# Allegro board usb port zhuxingDirect_sampling1010.brd
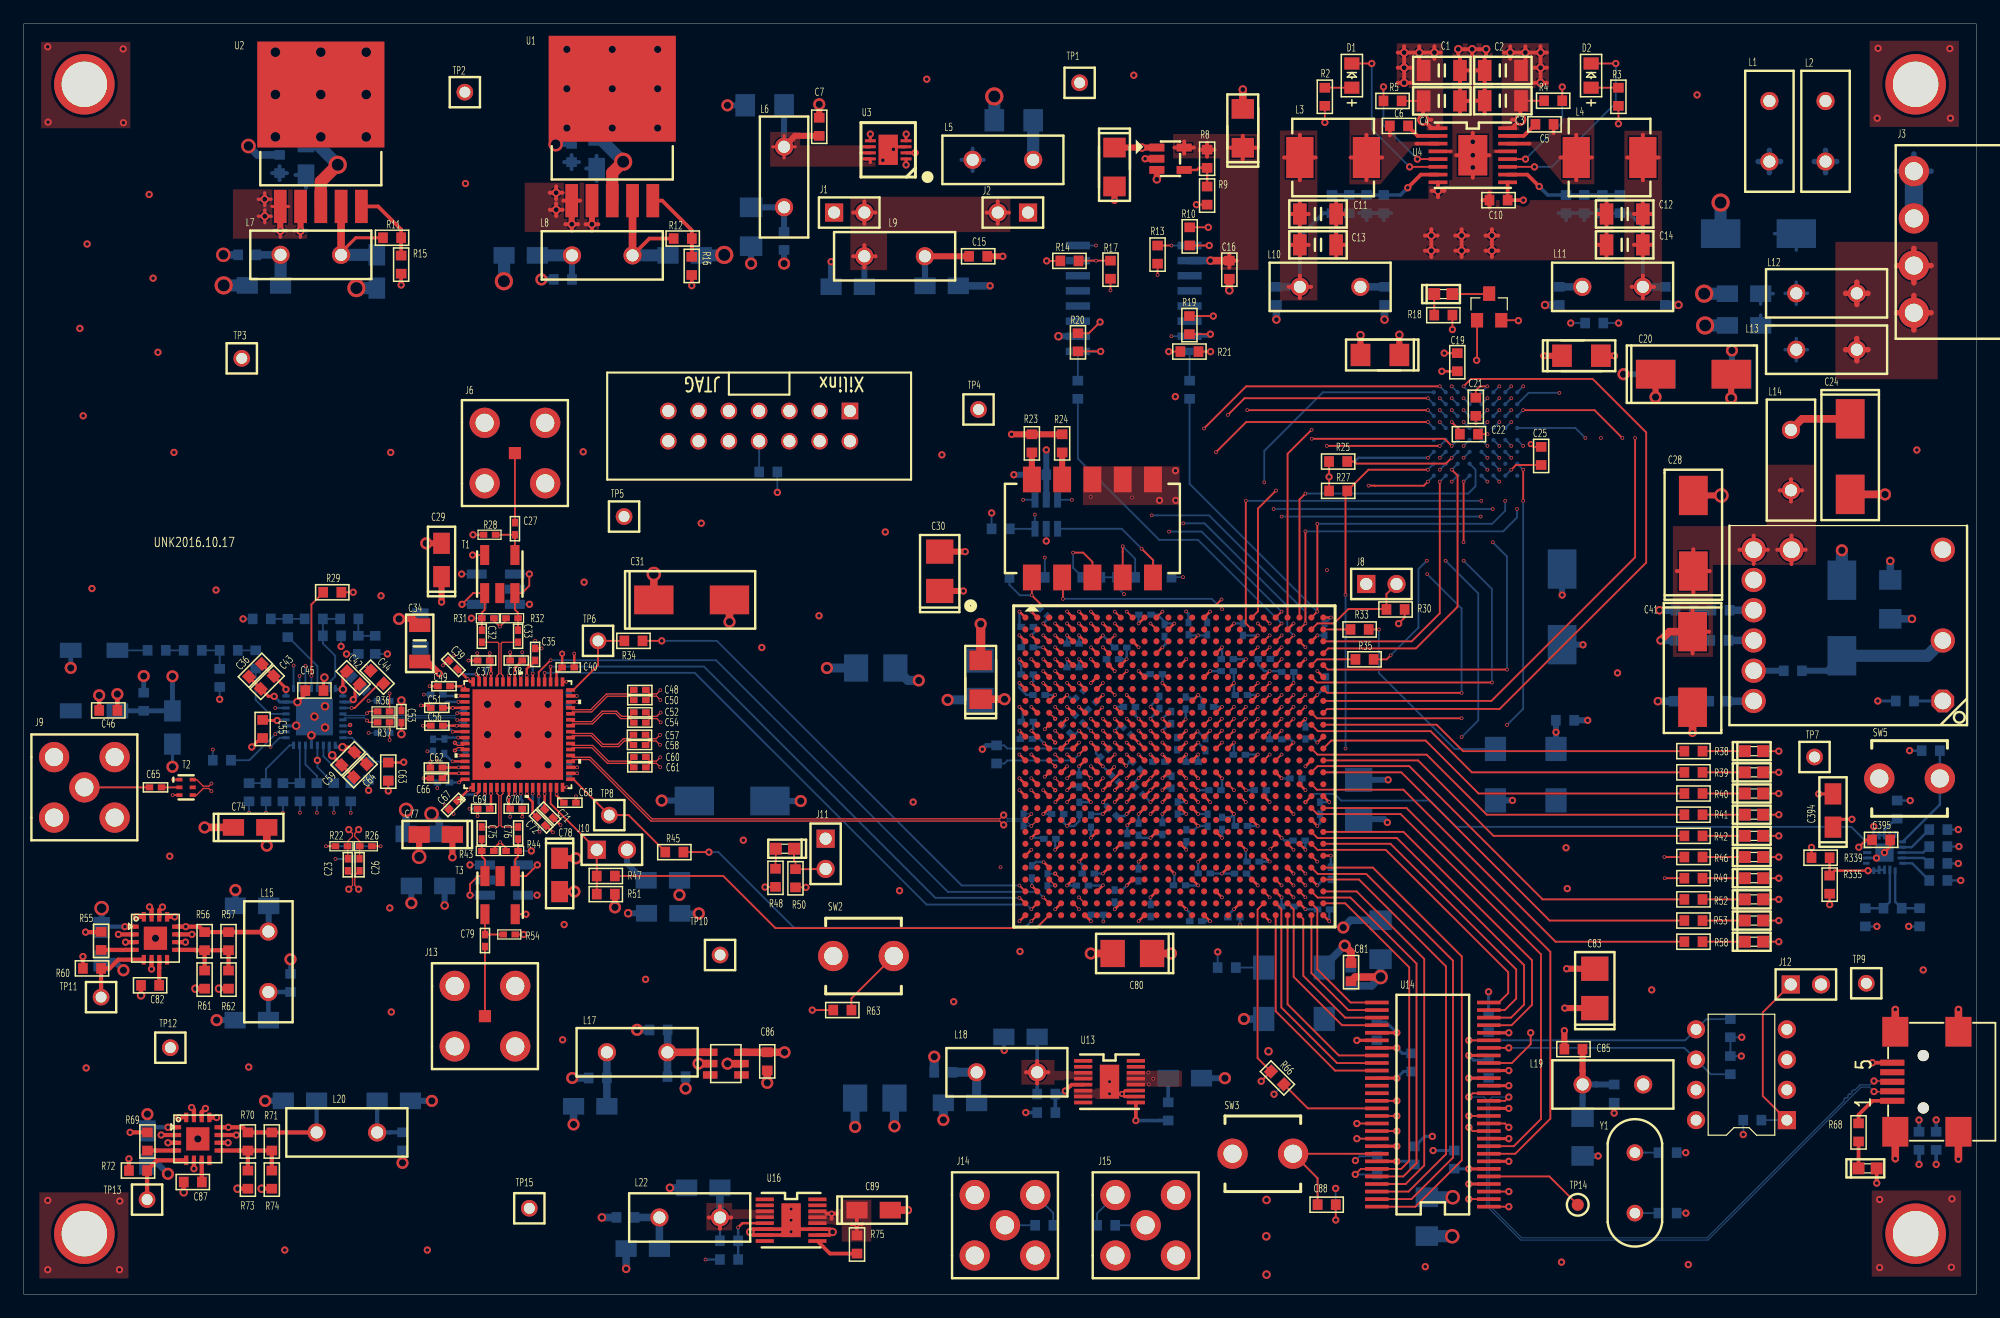
[diagram p0: board, top side]
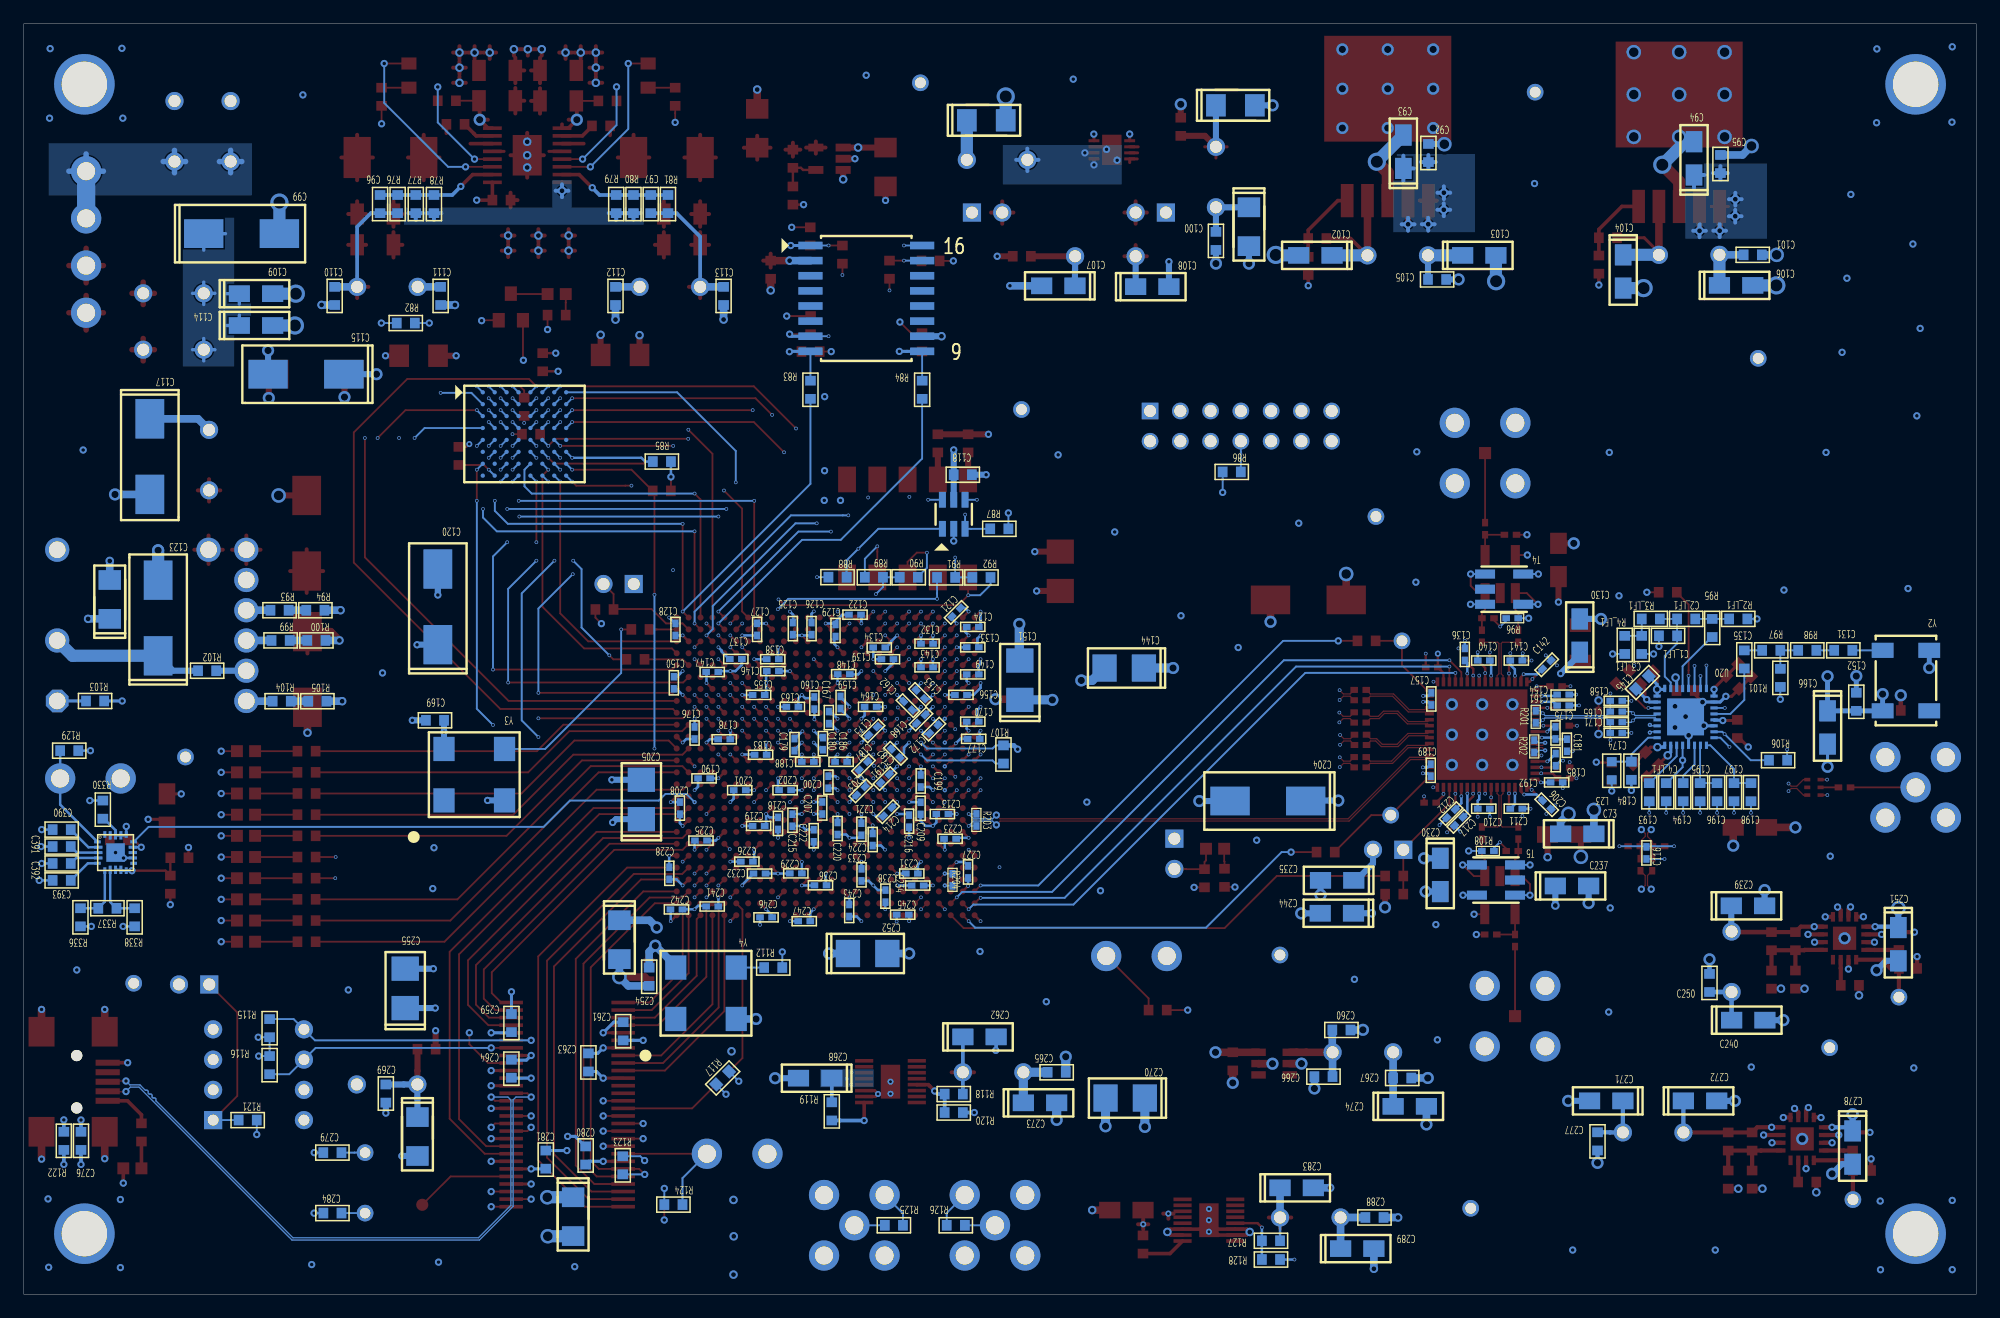
[diagram p1: board, bottom side, seen from below]

Outline 163.83 x 106.68 mm; copper layers: TOP, GND_2, PWR_3, GND_4, SIG_5, PWR_6, GND_7, SIG_8, GND_9, PWR_10, GND_11, BOTTOM. Coordinates in mm from the lower left corner of the outline.
Outline path: 0,106.68 0,0 163.83,0 163.83,106.68 0,106.68

## Design rules (mm)
net group ADC_CLK: nets ADC_CLK+ ADC_CLK-
net group CLK_OUT_2: nets 2581_FPGA_DCLK+ 2581_FPGA_DCLK-
net group EXT_CLK: nets EXT_CLK+ EXT_CLK-
net group LMX_RFOUTA: nets LMX_RFOUTB+ LMX_RFOUTB-
net group LMX_RFOUTB: nets LMX_RFOUTA+ LMX_RFOUTA-
net group SYNCINB: nets SYNCINB+ SYNCINB-
net group SYSREF: nets SYSREF+ SYSREF-
net group USB_CLK: nets N00596 N00636
net group VINA: nets VIN+A VIN-A
net group VINB: nets VIN+B VIN-B
net group ADC_OUT: nets N345204 N345212 N345220 N345228
net group OUT0: nets N345208
net group OUT1: nets N345216
net group OUT2: nets N345224
net group OUT3: nets N345232
net group SERDOUT: nets SERDOUT0+ SERDOUT1+ SERDOUT2+ SERDOUT3+
net group SERDOUT0: nets SERDOUT0-
net group SERDOUT1: nets SERDOUT1-
net group SERDOUT2: nets SERDOUT2-
net group SERDOUT3: nets SERDOUT3-

## Placement (name value [footprint] x y rotation side)
C1  22u  [SC1206]  118.99 102.77 180 top
C1_LF1  47p  [SC0603]  25.86 55.29 180 bottom
C2  22u  [SC1206]  124.11 102.77 0 top
C2_LF1  4.7n  [SC0603]  24.33 56.71 0 bottom
C3  22u  [SC1206]  124.11 100.22 0 top
C3_LF1  5.6p  [SC0603]  28.07 54.52 90 bottom
C4  22u  [SC1206]  118.99 100.21 180 top
C4_LF1  0  [SC0603]  26.01 42.15 90 bottom
C5  0.1u  [SC0603]  127.61 98.24 0 top
C6  0.1u  [SC0603]  115.39 98.11 0 top
C7  0.1u  [C0603]  66.75 98.03 90 top
C8  10u  [CT1206]  102.29 97.91 90 top
C9  10u  [CT1206]  91.52 94.66 270 top
C10  1u  [SC0603]  123.75 91.87 0 top
C11  22u  [SC1206]  108.6 90.71 180 top
C12  22u  [SC1206]  134.34 90.71 0 top
C13  22u  [SC1206]  108.6 88.12 180 top
C14  22u  [SC1206]  134.34 88.12 0 top
C15  0.1u  [SC0603]  80.08 87.16 0 top
C16  0.1u  [C0603]  101.16 86.03 270 top
C17  10u  [CT1206]  113.8 78.87 180 top
C18  10u  [CT1206]  130.7 78.81 0 top
C19  0.1u  [C0603]  120.29 78.26 90 top
C20  100u  [CT7343]  140.1 77.26 0 top
C21  0.1u  [C0603]  121.84 74.52 270 top
C22  0.1u  [C0603]  121.27 72.22 0 top
C23  100p  [SC0402]  27.18 36.06 270 top
C24  100u  [CT7343]  153.26 70.34 270 top
C25  0.1u  [C0603]  127.33 70.39 270 top
C26  100p  [SC0402]  28.17 36.06 270 top
C27  0.22uF  [SC0402]  41.21 64.28 90 top
C28  100u  [CT7343]  140.1 63.9 90 top
C29  10u  [STC3216]  35.05 61.66 90 top
C30  47u  [CT3528]  76.86 60.7 90 top
C31  47u  [STC7343]  56.04 58.3 0 top
C32  0.22uF  [SC0402]  38.43 55.25 90 top
C33  0.22uF  [SC0402]  41.48 55.25 90 top
C34  22u  [SC1206]  33.22 54.65 270 top
C35  0.1u  [C0402]  42.91 53.72 90 top
C36  100p  [SC0603]  19.43 52.39 45 top
C37  0.1u  [C0402]  38.59 53.21 180 top
C38  0.1u  [C0402]  41.32 53.21 180 top
C39  0.1u  [C0402]  36.04 52.85 135 top
C40  0.1u  [C0402]  45.68 52.63 0 top
C41  150u  [CT7343]  140.03 52.46 270 top
C42  100p  [SC0603]  27.64 51.77 315 top
C43  100p  [SC0603]  20.42 51.37 45 top
C44  100p  [SC0603]  29.64 51.82 135 top
C45  100p  [SC0603]  24.38 50.69 0 top
C46  1u  [SC0603]  7.09 49.02 180 top
C47  4.7u  [CT1206]  80.29 51.59 90 top
C48  0.1u  [C0402]  51.69 50.74 0 top
C49  0.1u  [C0402]  35.26 51.05 180 top
C50  0.1u  [C0402]  51.69 49.88 0 top
C51  0.1u  [C0402]  34.65 49.24 180 top
C52  0.1u  [C0402]  51.69 48.86 0 top
C53  100p  [SC0402]  31.68 48.5 270 top
C54  0.1u  [C0402]  51.69 48 0 top
C55  100p  [SC0603]  20.04 47.46 90 top
C56  0.1u  [C0402]  34.66 47.74 180 top
C57  0.1u  [C0402]  51.66 46.98 0 top
C58  0.1u  [C0402]  51.66 46.12 0 top
C59  100p  [SC0603]  27.2 44.97 45 top
C60  0.1u  [C0402]  51.69 45.1 0 top
C61  0.1u  [C0402]  51.69 44.24 0 top
C62  0.1u  [C0402]  34.62 44.23 180 top
C63  100p  [SC0603]  30.58 43.88 270 top
C64  100p  [SC0603]  28.22 43.96 45 top
C65  10p  [SC0402]  11.05 42.56 180 top
C66  0.1u  [C0402]  34.62 43.32 180 top
C67  0.1u  [C0402]  36.03 41.08 225 top
C68  0.1u  [C0402]  45.82 41.27 0 top
C69  0.1u  [C0402]  38.59 40.77 180 top
C70  0.1u  [C0402]  41.32 40.77 0 top
C71  0.1u  [C0402]  44.06 40.35 315 top
C72  0.1u  [C0402]  43.41 39.71 315 top
C73  10u  [STC3216]  33.48 38.66 0 bottom
C74  10u  [STC3216]  18.99 39.2 0 top
C75  0.22uF  [SC0402]  38.42 38.73 270 top
C76  0.22uF  [SC0402]  41.48 38.73 270 top
C77  10u  [STC3216]  34.57 38.6 180 top
C78  10u  [STC3216]  44.96 35.21 270 top
C79  0.22uF  [SC0402]  38.7 29.7 270 top
C80  47u  [CT3528]  93.02 28.61 180 top
C81  0.1u  [C0603]  111.37 27.04 270 top
C82  10n  [C0603]  10.6 25.94 180 top
C83  47u  [CT3528]  131.83 25.68 90 top
C85  0.1u  [C0603]  130.04 20.58 180 top
C86  0.1u  [SC0603]  62.38 19.55 90 top
C87  10n  [C0603]  14.18 9.42 180 top
C88  1u  [C0603]  109.33 7.52 0 top
C89  10u  [STC3216]  71.31 7.06 0 top
C90  10u  [CT1206]  62.16 99.83 180 bottom
C91  10u  [CT1206]  83.07 98.57 180 bottom
C92  1u  [SC0603]  45.97 95.83 90 bottom
C93  10u  [STC3216]  48.07 95.93 90 bottom
C94  10u  [STC3216]  23.68 95.38 90 bottom
C95  1u  [SC0603]  21.46 94.91 90 bottom
C96  NC  [SC0603]  133.94 91.54 270 bottom
C97  NC  [SC0603]  111.22 91.54 270 bottom
C98  10u  [CT1206]  61.03 89.64 270 bottom
C99  100u  [STC7343]  145.56 89.06 180 bottom
C100  0.1u  [C0603]  63.79 88.45 270 bottom
C101  0.1u  [SC0603]  18.75 87.28 180 bottom
C102  4.7u  [STC3216]  55.45 87.23 0 bottom
C103  10u  [STC3216]  41.7 87.23 180 bottom
C104  4.7u  [STC3216]  29.62 85.88 270 bottom
C105  0.1u  [SC0603]  45.24 85.21 180 bottom
C106  10u  [STC3216]  20.15 84.71 180 bottom
C107  10u  [STC3216]  77.02 84.68 0 bottom
C108  4.7u  [STC3216]  69.14 84.6 180 bottom
C109  10u  [STC3216]  144.35 84.02 180 bottom
C110  1u  [SC0603]  137.75 83.83 90 bottom
C111  0.1u  [SC0603]  128.85 83.83 90 bottom
C112  1u  [SC0603]  114.18 83.83 90 bottom
C113  0.1u  [SC0603]  105.11 83.83 90 bottom
C114  10u  [STC3216]  144.35 81.35 180 bottom
C115  100u  [CT7343]  140.16 77.26 0 bottom
C116  100p  [SC0402]  27.67 37.06 90 bottom
C117  150u  [CT7343]  153.26 70.34 270 bottom
C118  0.1u  [C0603]  85.04 68.81 180 bottom
C119  10u  [CT1206]  156.62 58.34 90 bottom
C120  100u  [CT7343]  129.09 57.72 90 bottom
C121  0.1u  [C0402]  85.59 57.26 135 bottom
C122  0.1u  [C0402]  94.08 57.06 0 bottom
C123  330u  [CT7343]  152.56 56.78 90 bottom
C124  0.1u  [C0402]  84.2 56.03 180 bottom
C125  0.1u  [C0402]  99.3 55.89 90 bottom
C126  0.1u  [C0402]  97.73 55.89 90 bottom
C127  0.1u  [C0402]  102.3 55.83 270 bottom
C128  0.1u  [C0402]  109.15 55.82 90 bottom
C129  0.1u  [C0402]  95.72 55.74 90 bottom
C130  10u  [STC3216]  33.27 55.31 90 bottom
C131  0.1u  [SC0603]  11.15 54.07 0 bottom
C132  0.1u  [C0402]  88.04 54.62 180 bottom
C133  0.1u  [C0402]  84.2 54.32 180 bottom
C134  0.1u  [C0402]  92.05 54.31 180 bottom
C135  0.1u  [SC0603]  19.46 53.31 270 bottom
C136  0.1u  [C0402]  42.91 53.72 90 bottom
C137  0.1u  [C0402]  104.08 53.34 180 bottom
C138  0.1u  [C0402]  100.99 53.32 180 bottom
C139  0.1u  [C0402]  91.36 53.32 180 bottom
C140  0.1u  [C0402]  41.32 53.21 0 bottom
C141  0.1u  [C0402]  38.59 53.21 180 bottom
C142  0.1u  [C0402]  36.03 52.85 135 bottom
C143  0.1u  [C0402]  88.04 52.64 180 bottom
C144  47u  [CT3528]  71.49 52.58 0 bottom
C145  100p  [SC0603]  28.01 51.36 315 bottom
C146  0.1u  [C0402]  100.98 52.32 0 bottom
C147  0.1u  [C0402]  106.07 52.25 180 bottom
C148  0.1u  [C0402]  95.03 52.06 180 bottom
C149  0.1u  [C0402]  84.2 52.05 180 bottom
C150  0.1u  [C0402]  109.28 51.34 270 bottom
C151  47u  [CT3528]  80.25 51.56 90 bottom
C152  0.1u  [SC0603]  10.06 49.75 90 bottom
C153  0.1u  [C0402]  88.59 50.37 225 bottom
C154  0.1u  [C0402]  34.66 50.35 180 bottom
C155  0.1u  [C0402]  102.17 50.32 180 bottom
C156  0.1u  [C0402]  85.19 50.32 180 bottom
C157  0.1u  [C0402]  45.72 49.99 90 bottom
C158  100p  [SC0402]  30.2 49.83 180 bottom
C159  0.1u  [C0402]  95.29 49.69 90 bottom
C160  0.1u  [C0402]  97.49 49.64 90 bottom
C161  0.1u  [C0402]  34.66 49.44 180 bottom
C162  0.1u  [C0402]  89.64 49.42 45 bottom
C163  0.1u  [C0402]  99.34 49.32 180 bottom
C164  0.1u  [C0402]  92.77 49.32 0 bottom
C165  100p  [SC0402]  30.2 48.92 180 bottom
C166  10u  [STC3216]  12.47 47.59 270 bottom
C167  0.1u  [C0402]  96.28 48.42 90 bottom
C168  0.1u  [C0402]  88.55 48.3 135 bottom
C169  0.1u  [C0603]  129.33 48.19 0 bottom
C170  0.1u  [C0402]  84.2 48.08 180 bottom
C171  100p  [SC0402]  30.2 48.03 180 bottom
C172  0.1u  [C0402]  87.46 47.45 135 bottom
C173  0.1u  [C0402]  92.57 47.29 315 bottom
C174  100p  [SC0402]  30.2 47.14 180 bottom
C175  0.1u  [C0402]  35.3 47.13 90 bottom
C176  0.1u  [C0402]  107.55 47.13 270 bottom
C177  0.1u  [C0402]  84.12 46.63 180 bottom
C178  0.1u  [C0402]  105.06 46.6 0 bottom
C179  0.1u  [C0402]  99.16 46.15 270 bottom
C180  0.1u  [C0402]  96.78 46.23 90 bottom
C181  0.1u  [C0402]  34.34 46.1 270 bottom
C182  0.1u  [C0402]  90.68 45.42 225 bottom
C183  0.1u  [C0402]  102 45.3 0 bottom
C184  100p  [SC0603]  28.93 43.96 90 bottom
C185  0.1u  [C0402]  35.28 44.89 270 bottom
C186  0.1u  [C0402]  95.25 44.7 180 bottom
C187  0.1u  [C0402]  93.37 44.37 315 bottom
C188  0.1u  [C0402]  98.04 44.7 180 bottom
C189  0.1u  [C0402]  45.77 43.99 270 bottom
C190  0.1u  [C0402]  106.75 43.31 0 bottom
C191  0.1u  [C0402]  91.57 43.3 135 bottom
C192  0.1u  [C0402]  35.2 42.98 180 bottom
C193  2.2u  [SC0603]  27.43 42.15 90 bottom
C194  1u  [SC0603]  24.59 42.15 90 bottom
C195  22u  [SC0603]  23.16 42.15 90 bottom
C196  10u  [SC0603]  21.74 42.15 90 bottom
C197  22u  [SC0603]  20.32 42.15 90 bottom
C198  10u  [SC0603]  18.9 42.15 90 bottom
C199  0.1u  [C0402]  88.57 43.09 270 bottom
C200  0.1u  [C0402]  96.32 42.99 90 bottom
C201  0.1u  [C0402]  103.76 42.32 0 bottom
C202  0.1u  [C0402]  99.95 42.32 0 bottom
C203  0.1u  [C0402]  93.59 42.26 135 bottom
C204  47u  [STC7343]  59.44 41.41 0 bottom
C205  47u  [CT3528]  112.01 41.54 90 bottom
C206  0.1u  [C0402]  36.03 41.1 225 bottom
C207  0.1u  [C0402]  96.83 40.83 270 bottom
C208  0.1u  [C0402]  108.78 40.82 270 bottom
C209  0.1u  [C0402]  88.58 40.8 270 bottom
C210  0.1u  [C0402]  41.32 40.77 180 bottom
C211  0.1u  [C0402]  38.59 40.77 180 bottom
C212  0.1u  [C0402]  44.07 40.36 315 bottom
C213  0.1u  [C0402]  86.75 40.32 0 bottom
C214  0.1u  [C0402]  91.34 40.51 315 bottom
C215  0.1u  [C0402]  99.33 39.8 270 bottom
C216  0.1u  [C0402]  89.55 39.72 90 bottom
C217  0.1u  [C0402]  43.41 39.71 315 bottom
C218  0.1u  [C0402]  100.55 39.53 90 bottom
C219  0.1u  [C0402]  102.17 39.32 180 bottom
C220  0.1u  [C0402]  95.55 39.11 270 bottom
C221  0.1u  [C0402]  93.55 39.04 270 bottom
C222  0.1u  [C0402]  97.55 38.5 90 bottom
C223  0.1u  [C0402]  86.1 38.24 180 bottom
C224  0.1u  [C0402]  92.6 38.18 270 bottom
C225  0.1u  [C0402]  107.01 38.09 180 bottom
C226  0.1u  [C0402]  103.16 36.32 180 bottom
C227  0.1u  [C0402]  84.6 35.46 90 bottom
C228  0.1u  [C0402]  109.66 35.34 90 bottom
C229  0.1u  [C0402]  99.05 35.34 180 bottom
C230  10u  [STC3216]  44.97 35.21 270 bottom
C231  0.1u  [C0402]  89.32 35.32 180 bottom
C232  0.1u  [C0402]  102.1 35.32 0 bottom
C233  0.1u  [C0402]  93.54 35.21 270 bottom
C234  0.1u  [C0402]  88.82 34.32 0 bottom
C235  10u  [STC3216]  53.62 34.75 0 bottom
C236  0.1u  [C0402]  96.98 34.34 180 bottom
C237  10u  [STC3216]  33.92 34.28 180 bottom
C238  0.1u  [C0402]  91.53 33.43 90 bottom
C239  4.7u  [STC3216]  19.15 32.61 180 bottom
C240  10u  [STC3216]  19.13 23.01 180 bottom
C241  0.1u  [C0402]  106.07 32.56 0 bottom
C242  0.1u  [C0402]  109.07 32.31 180 bottom
C243  0.1u  [C0402]  94.57 32.22 270 bottom
C244  10u  [STC3216]  53.65 31.99 0 bottom
C245  0.1u  [C0402]  90.08 31.87 0 bottom
C246  0.1u  [C0402]  101.55 31.64 0 bottom
C247  0.1u  [C0402]  98.34 31.32 180 bottom
C248  10u  [CT1206]  113.85 29.77 270 bottom
C250  0.1u  [SC0603]  22.38 26.14 90 bottom
C251  4.7u  [STC3216]  6.53 29.39 270 bottom
C252  47u  [CT3528]  93.02 28.61 180 bottom
C254  1u  [C0603]  111.35 26.66 270 bottom
C255  47u  [CT3528]  131.83 25.68 90 bottom
C259  0.1u  [C0603]  122.91 22.77 270 bottom
C260  0.1u  [SC0603]  53.27 22.19 0 bottom
C261  0.1u  [C0603]  113.54 22.08 270 bottom
C262  10u  [STC3216]  83.64 21.61 180 bottom
C263  0.1u  [C0603]  116.45 19.46 270 bottom
C264  0.1u  [C0603]  122.92 18.94 270 bottom
C265  0.1u  [SC0603]  77.16 18.63 180 bottom
C266  1u  [SC0603]  54.77 18.27 0 bottom
C267  0.1u  [SC0603]  48.16 18.16 180 bottom
C268  10u  [STC3216]  97.43 18.14 0 bottom
C269  0.01u  [C0603]  133.45 16.85 270 bottom
C270  47u  [CT3528]  71.41 16.47 0 bottom
C271  10u  [STC3216]  31.04 16.23 0 bottom
C272  4.7u  [STC3216]  23.17 16.23 180 bottom
C273  10u  [STC3216]  78.56 16.07 180 bottom
C274  10u  [STC3216]  47.53 15.77 180 bottom
C275  4.7u  [CT1206]  130.8 13.24 270 bottom
C276  4700pF/250V  [SC0603]  159.03 12.88 90 bottom
C277  0.1u  [SC0603]  31.78 12.83 270 bottom
C278  4.7u  [STC3216]  10.37 12.31 270 bottom
C279  12p  [C0603]  137.94 11.89 0 bottom
C280  0.1u  [C0603]  116.68 11.65 270 bottom
C281  0.1u  [C0603]  120.03 11.3 270 bottom
C283  10u  [STC3216]  57.02 8.93 180 bottom
C284  12p  [C0603]  137.93 6.81 0 bottom
C287  4.7u  [CT1206]  117.74 6.51 270 bottom
C288  0.1u  [SC0603]  50.49 6.44 180 bottom
C289  10u  [STC3216]  51.94 3.83 180 bottom
C390  22n  [SC0603]  160.66 39.01 0 bottom
C391  22n  [SC0603]  160.66 37.59 0 bottom
C392  22n  [SC0603]  160.66 36.17 0 bottom
C393  22n  [SC0603]  160.66 34.75 0 bottom
C394  10u  [STC3216]  151.82 40.61 90 top
C395  0.1u  [SC0603]  155.85 38.15 0 top
D1  LED  [SD0805-LED]  111.44 102.33 90 top
D2  LED  [SD0805-LED]  131.52 102.33 90 top
D3  LED  [LED0603]  119.12 83.99 0 top
D4  LED  [LED0603]  145.19 45.6 0 top
D5  LED  [LED0603]  145.19 43.82 0 top
D6  LED  [LED0603]  145.19 42.04 0 top
D7  LED  [LED0603]  145.19 40.27 0 top
D8  LED  [LED0603]  145.19 38.49 0 top
D9  LED  [LED0603]  63.87 37.41 180 top
D10  LED  [LED0603]  145.19 36.71 0 top
D11  LED  [LED0603]  145.19 34.93 0 top
D12  LED  [LED0603]  145.19 33.15 0 top
D13  LED  [LED0603]  145.19 31.38 0 top
D14  LED  [LED0603]  145.19 29.6 0 top
D15  LED  [LED0603]  154.72 10.57 0 top
J1  JUMPER2  [SIP-2P]  69.26 90.83 0 top
J2  JUMPER2  [SIP-2P]  83 90.83 180 top
J3  CONN PWR 4-R  [PWR396P-4D]  158.6 88.36 90 top
J5  JTAG Connector  [JTAG-14P]  74.45 77.39 180 top
J6  SMA  [SMA_DONG1]  41.21 70.63 0 top
J8  JUMPER2  [SIP-2P]  113.92 59.64 0 top
J9  SMA  [SMA5-RF]  5.08 42.56 0 top
J10  CON2_0  [SIP-2P]  49.34 37.32 0 top
J11  JUMPER2  [SIP-2P]  67.28 36.98 270 top
J12  JUMPER2  [SIP-2P]  149.54 26.01 0 top
J13  SMA  [SMA_DONG1]  38.7 23.35 0 top
J14  -  [SMA]  82.33 5.79 0 top
J15  -  [SMA]  94.14 5.79 0 top
L1  -  [BL02RN2R1M2B]  146.48 97.66 90 top
L2  -  [BL02RN2R1M2B]  151.19 97.66 90 top
L3  4.7uH  [IHLP-2525]  109.87 95.45 0 top
L4  4.7uH  [IHLP-2525]  133.07 95.45 0 top
L5  INDUCTOR  [BL02RN2R1M2B]  82.16 95.26 180 top
L6  -  [BL02RN2R1M2B]  63.79 93.81 270 top
L7  -  [BL02RN2R1M2B]  24.08 87.28 180 top
L8  -  [BL02RN2R1M2B]  48.54 87.23 180 top
L9  -  [BL02RN2R1M2B]  73.07 87.16 0 top
L10  -  [BL02RN2R1M2B]  109.62 84.59 180 top
L11  -  [BL02RN2R1M2B]  133.32 84.59 180 top
L12  -  [BL02RN2R1M2B]  151.27 84.05 180 top
L13  -  [BL02RN2R1M2B]  151.27 79.31 180 top
L14  INDUCTOR  [BL02RN2R1M2B]  148.29 70.04 90 top
L15  -  [BL02RN2R1M2B]  20.52 27.91 270 top
L17  -  [BL02RN2R1M2B]  51.47 20.31 180 top
L18  -  [BL02RN2R1M2B]  82.49 18.63 0 top
L19  INDUCTOR  [BL02RN2R1M2B]  133.35 17.61 180 top
L20  -  [BL02RN2R1M2B]  27.11 13.58 0 top
L22  -  [BL02RN2R1M2B]  55.88 6.44 0 top
L23  120 ohm  [SL0603]  30.58 43.96 270 bottom
NOREF  -  [unnamed]  158.75 101.6 0 top
NOREF#2  -  [unnamed]  5.08 5.08 0 top
NOREF#3  -  [unnamed]  158.75 5.08 0 top
Q1  NDS331N  [SOT-23]  122.96 82.91 0 top
R2  4.7k  [SR0603]  109.17 100.55 270 top
R2_LF1  560  [SR0603]  19.96 56.71 0 bottom
R3  4.7k  [SR0603]  133.81 100.55 270 top
R3_LF1  4.7k  [SR0603]  27.31 56.71 0 bottom
R4  10k  [SR0603]  128.33 100.22 0 top
R4_LF1  0  [SR0603]  29.49 54.52 270 bottom
R5  10k  [SR0603]  114.86 100.21 0 top
R8  4.53k  [R0603]  99.29 95.35 270 top
R9  1k  [R0603]  99.29 92.26 270 top
R10  4.7k  [R0603]  97.84 88.83 270 top
R11  0  [SR0603]  30.9 88.71 0 top
R12  0  [SR0603]  55.29 88.65 0 top
R13  15  [R0603]  95.14 87.3 90 top
R14  R  [R0603]  87.74 86.77 0 top
R15  NA  [SR0603]  31.66 86.46 90 top
R16  NA  [SR0603]  56.05 86.35 90 top
R17  15  [R0603]  91.19 86.03 270 top
R18  100  [R0603]  119.12 82.22 180 top
R19  4.7k  [R0603]  97.81 81.38 270 top
R20  4.7k  [R0603]  88.46 79.93 270 top
R21  R  [R0603]  97.81 79.16 0 top
R22  51  [SR0402]  26.65 37.62 180 top
R23  220  [R0603]  84.59 71.45 90 top
R24  220  [R0603]  87.13 71.45 90 top
R25  4.7k  [R0603]  110.29 69.92 0 top
R26  51  [SR0402]  28.7 37.62 0 top
R27  4.7k  [R0603]  110.29 67.46 0 top
R28  NC  [SR0402]  39.08 63.77 0 top
R29  1.3k  [SR0603]  25.88 58.94 0 top
R30  1k  [R0603]  115.11 57.5 0 top
R31  50  [SR0402]  38.94 56.76 180 top
R32  50  [SR0402]  40.97 56.76 180 top
R33  R  [R0603]  112.09 55.82 180 top
R34  0  [SR0603]  51.16 54.86 180 top
R35  R  [R0603]  112.5 53.31 0 top
R36  51  [SR0402]  30.18 48.94 180 top
R37  51  [SR0402]  30.18 48.02 180 top
R38  10k  [R0603]  140.11 45.6 0 top
R39  10k  [R0603]  140.11 43.82 0 top
R40  10k  [R0603]  140.11 42.04 0 top
R41  10k  [R0603]  140.11 40.27 0 top
R42  10k  [R0603]  140.11 38.49 0 top
R43  50  [SR0402]  38.93 37.22 0 top
R44  50  [SR0402]  40.97 37.22 0 top
R45  0  [SR0603]  54.59 37.12 180 top
R46  10k  [R0603]  140.11 36.71 0 top
R47  0  [SR0603]  48.84 35.12 180 top
R48  27.4  [R0603]  63.08 34.96 270 top
R49  10k  [R0603]  140.11 34.93 0 top
R50  330  [R0603]  64.75 34.93 90 top
R51  10k  [SR0603]  48.84 33.6 0 top
R52  10k  [R0603]  140.11 33.15 0 top
R53  10k  [R0603]  140.11 31.38 0 top
R54  NC  [SR0402]  40.73 30.21 180 top
R55  0  [SR0603]  6.48 29.67 270 top
R56  15k  [SR0603]  15.17 29.64 90 top
R57  NC  [SR0603]  17.18 29.64 90 top
R58  10k  [R0603]  140.11 29.6 0 top
R60  100k  [SR0603]  5.72 27.36 0 top
R61  10k  [SR0603]  15.17 26.42 90 top
R62  NC  [SR0603]  17.18 26.42 90 top
R63  4.7k  [R0603]  68.68 23.86 0 top
R66  50  [R0603]  105.2 18.16 315 top
R68  4.7k  [R0603]  153.96 13.58 90 top
R69  0  [SR0603]  10.37 12.82 270 top
R70  15k  [SR0603]  18.8 12.82 90 top
R71  NC  [SR0603]  20.81 12.82 90 top
R72  100k  [SR0603]  9.58 10.38 0 top
R73  10k  [SR0603]  18.8 9.62 90 top
R74  NC  [SR0603]  20.81 9.62 90 top
R75  10k  [SR0603]  69.92 4.17 270 top
R76  73.2k  [SR0603]  132.46 91.54 270 bottom
R77  NC  [SR0603]  130.94 91.54 270 bottom
R78  22.1k  [SR0603]  129.42 91.54 270 bottom
R79  NC  [SR0603]  114.12 91.54 90 bottom
R80  22.1k  [SR0603]  112.67 91.54 90 bottom
R81  49.9k  [SR0603]  109.78 91.54 270 bottom
R82  4.7k  [R0603]  131.78 81.55 180 bottom
R83  15  [R0603]  97.82 75.95 90 bottom
R84  15  [R0603]  88.45 75.95 270 bottom
R85  4.7k  [R0603]  110.29 69.92 0 bottom
R86  1k  [R0603]  62.47 69.05 180 bottom
R87  4.7k  [R0603]  81.97 64.27 180 bottom
R88  1.21k  [R0603]  95.55 60.21 0 bottom
R89  1.21k  [R0603]  92.5 60.2 180 bottom
R90  1.21k  [R0603]  89.57 60.2 0 bottom
R91  1.21k  [R0603]  86.44 60.19 180 bottom
R92  1.21k  [R0603]  83.47 60.19 0 bottom
R93  20.8k  [R0603]  142.37 57.43 180 bottom
R94  0  [R0603]  139.37 57.43 180 bottom
R95  NC  [SR0603]  22.15 55.95 270 bottom
R96  NA  [SR0402]  38.93 56.76 180 bottom
R97  18  [SR0603]  17.2 54.07 0 bottom
R98  56  [SR0603]  14.17 54.07 0 bottom
R99  68k  [R0603]  142.28 54.9 180 bottom
R100  13k  [R0603]  139.28 54.9 180 bottom
R101  68  [SR0603]  16.43 51.76 90 bottom
R102  0  [R0603]  148.45 52.35 0 bottom
R103  1k  [R0603]  157.85 49.81 0 bottom
R104  150k  [R0603]  142.19 49.8 180 bottom
R105  3.9k  [R0603]  139.2 49.8 180 bottom
R106  1.3k  [SR0603]  16.62 44.84 180 bottom
R107  100  [R0603]  81.63 45.32 270 bottom
R108  NA  [SR0402]  40.98 37.22 0 bottom
R112  1k  [R0603]  100.94 27.43 180 bottom
R115  2.2k  [R0603]  143.21 22.34 90 bottom
R116  2.2k  [R0603]  143.21 19.23 270 bottom
R117  4.7k  [R0603]  105.19 18.16 135 bottom
R118  0  [SR0603]  85.8 16.8 0 bottom
R119  10k  [SR0603]  96.03 15.35 270 bottom
R120  NC  [SR0603]  85.8 15.26 180 bottom
R121  4.7k  [R0603]  145.05 14.62 0 bottom
R122  1M  [SR0603]  160.47 12.88 270 bottom
R123  4.7k  [R0603]  113.57 10.82 270 bottom
R124  2.2k  [R0603]  109.32 7.52 180 bottom
R125  50  [R0603]  90.82 5.79 0 bottom
R126  50  [R0603]  85.62 5.79 180 bottom
R127  0  [SR0603]  59.18 4.49 0 bottom
R128  NC  [SR0603]  59.18 2.91 180 bottom
R129  100k  [SR0603]  160.02 45.64 180 bottom
R201  100  [SR0402]  36.96 48.49 270 bottom
R202  100  [SR0402]  37.08 46 270 bottom
R203  100  [SR0402]  83.9 39.83 270 bottom
R204  100  [SR0402]  85.9 34.8 270 bottom
R330  100k  [SR0603]  157.2 40.69 270 bottom
R335  10k  [SR0603]  151.54 34.39 270 top
R336  10k  [SR0603]  159.08 31.65 270 bottom
R337  1k  [SR0603]  156.82 32.41 0 bottom
R338  14.3k  [SR0603]  154.53 31.65 90 bottom
R339  65k  [SR0603]  150.77 36.65 0 top
SW1  SW DIP-5  [SW_SDA_10P]  89.67 64.3 90 top
SW2  Push Button  [PSW2-T]  70.46 28.4 0 top
SW3  CY RESET  [PSW2-T]  103.97 11.79 0 top
SW5  Push Button  [PSW2-T]  158.24 43.31 0 top
T1  TC1-1-13MA+  [AT224-1]  39.94 60.47 180 top
T2  -  [B0430J50100AHF]  13.61 42.56 0 top
T3  TC1-1-13MA+  [AT224-1]  39.97 33.51 0 top
T4  TC1-1-13MA+  [AT224-1]  39.61 59.2 90 bottom
T5  TC1-1-13MA+  [AT224-1]  40.3 34.78 270 bottom
TP1  TEST POINT  [SIP-1P]  88.6 101.73 0 top
TP2  TEST POINT  [SIP-1P]  37.01 100.94 0 top
TP3  TEST POINT  [SIP-1P]  18.29 78.59 0 top
TP4  TEST POINT  [SIP-1P]  80.11 74.3 0 top
TP5  TEST POINT  [SIP-1P]  50.37 65.3 0 top
TP6  TEST POINT  [SIP-1P]  48.18 54.86 0 top
TP7  TEST POINT  [SIP-1P]  150.27 45.11 0 top
TP8  TEST POINT  [SIP-1P]  49.13 40.23 0 top
TP9  TEST POINT  [SIP-1P]  154.61 26.11 0 top
TP10  TEST POINT  [SIP-1P]  58.43 28.48 0 top
TP11  TEST POINT  [SIP-1P]  6.48 24.95 0 top
TP12  TEST POINT  [SIP-1P]  12.29 20.7 0 top
TP13  TEST POINT  [SIP-1P]  10.34 7.95 0 top
TP14  CY CLKOUT  [TP-40-SMD]  130.4 7.51 0 top
TP15  TEST POINT  [SIP-1P]  42.42 7.21 0 top
U1  LT1764A-3.3  [TO170P-1394X457-5TN]  49.38 96.15 90 top
U2  LT1764A-3.3  [TO170P-1394X457-5TN]  24.92 95.66 90 top
U3  LT3015-2.5  [DFN8]  72.53 96.1 90 top
U4  TPS54494PWP  [SOP65P-440-16TN]  121.59 95.64 0 top
U5  ADP123  [TSOT_5]  96.22 95.35 270 top
U6  PTH08T230W  [R-PDSS-T10_CZ]  153.09 56.16 180 top
U7  AD9680  [CP_64_15]  41.45 46.99 90 top
U8  -  [XC7K410TFFG676]  96.55 44.32 0 top
U9  ADP1741  [LFCSP16-HS]  8.79 27.69 0 top
U10  ADR130  [TSOT-23-6]  60.83 17.77 90 top
U11  24LC128  [DIP8_3]  147.95 14.62 180 top
U12  USBCON  [CONN_USB_B_CHL]  160.84 17.84 90 top
U13  LT3022-1.2  [SOP50P-300-16TN]  91.1 17.85 0 top
U14  CY7C68013A  [SOP63P-750-56N]  118.24 15.91 180 top
U15  ADP1741  [LFCSP16-HS]  12.35 10.84 0 top
U16  LT3022-1.8  [SOP50P-300-16TN]  64.38 6.21 0 top
U17  N25Q128  [SO16_50P300X413]  93.14 83.62 180 bottom
U18  PC28F00AP30TF  [BGA64_8X10MM]  121.82 72.24 180 bottom
U19  SN74LVC1G18DBVR  [SOT23_6]  85.8 65.49 180 bottom
U20  LMX2581  [QFN50P-500X500-32TD]  24.38 48.48 270 bottom
U27  TPS386000  [VQFN20]  157.93 35.28 180 bottom
UNK2016.10.17  -  [unnamed]  5.08 101.6 0 top
Y1  24MHz  [XTAL2-200]  135.19 9.35 90 top
Y2  CCHD-575-100.000  [OSCSC508P-750X508-4D]  5.89 51.53 0 bottom
Y3  OSC  [OSCSC508P-700X500-4M]  126.03 43.62 90 bottom
Y4  OSC  [OSCSC508P-700X500-4M]  106.59 25.27 90 bottom

## Library data of the parts
C1 C1_LF1 C2 C2_LF1 C3 C3_LF1 C4 C4_LF1 C5-C7 C10-C16 C19 C21-C23 C25-C27 C30 C32-C40 C42-C46 C48-C72 C75 C76 C79-C83 C85-C88 C92 C95-C97 C100 C101 C105 C110-C113 C116 C118 C121 C122 C124-C129 C131-C165 C167-C203 C205-C229 C231-C234 C236 C238 C241-C243 C245-C247 C250 C252 C254 C255 C259-C261 C263-C267 C269 C270 C276 C277 C279-C281 C284 C288 C390-C393 C395 = CAP NP
C8 C9 C20 C24 C28 C41 C90 C91 C98 C115 C117 C119 C120 C123 C248 C287 = C
C17 C18 C29 C31 C47 C73 C74 C77 C78 C89 C93 C94 C99 C102-C104 C106-C109 C114 C130 C166 C204 C230 C235 C237 C239 C240 C244 C251 C262 C268 C271-C275 C278 C283 C289 C394 = CAP
D1 D2 = LED
D3-D15 = LED: Tolerance: TOL; User Part Number: NA
J1 J2 J8 J11 J12 = JUMPER2
J3 = CONN PWR 4-R
J5 = HEADER 7X2
J6 J9 J13-J15 = SMA-5
J10 = CON2_0
L1 L2 L6-L13 L15 L17 L18 L20 L22 L23 = FERRITE BEAD
L3-L5 L14 L19 = INDUCTOR
Q1 = NDB7050L/TO
R2 R2_LF1 R3 R3_LF1 R4 R4_LF1 R5 R8-R58 R60-R63 R66 R68-R108 R112 R115-R121 R123-R129 R201-R204 R330 R335-R339 = R
R122 = RESISTOR
SW1 = SW DIP-5
SW2 SW3 SW5 = SW PUSHBUTTON
T1 T3-T5 = TC1-1-13MA+
T2 = 0430J50100AHF
TP1-TP15 = TEST POINT
U1 U2 = LT1764A
U3 = LT3015-2.5
U4 = TPS54494PWP
U5 = ADP123
U6 = PTH04T230W
U7 = AD9680
U8 = Kintex7_FFG676
U9 U15 = ADP1741
U10 = ADR130
U11 = 24LC128: Tolerance: ***
U12 = USBCON
U13 U16 = LT3022
U14 = CY7C68013A
U17 = N25Q128
U18 = PC28F00AP30TF
U19 = SN74LVC1G18DBVR
U20 = LMX2581
U27 = TPS386000
Y1 = CRYSTAL
Y2-Y4 = OSC

## Footprints (pads in the part's own frame, mm; a bottom-side part is the same pattern mirrored in y, then rotated)
AT224-1
  rect 0.762x1.676 smd: 1(-1.27,1.6) 2(0,1.6) 3(1.27,1.6) 4(1.27,-1.6) 6(-1.27,-1.6)
B0430J50100AHF
  rect 0.508x0.305 smd: 1(-0.559,0.65) 2(-0.559,0) 3(-0.559,-0.65) 4(0.559,-0.65) 5(0.559,0) 6(0.559,0.65)
BGA64_8X10MM
  round 0.356 smd: A1(-3.5,3.5) A2(-2.5,3.5) A3(-1.5,3.5) A4(-0.5,3.5) A5(0.5,3.5) A6(1.5,3.5) A7(2.5,3.5) A8(3.5,3.5) B1(-3.5,2.5) B2(-2.5,2.5) B3(-1.5,2.5) B4(-0.5,2.5) B5(0.5,2.5) B6(1.5,2.5) B7(2.5,2.5) B8(3.5,2.5) C1(-3.5,1.5) C2(-2.5,1.5) C3(-1.5,1.5) C4(-0.5,1.5) C5(0.5,1.5) C6(1.5,1.5) C7(2.5,1.5) C8(3.5,1.5) D1(-3.5,0.5) D2(-2.5,0.5) D3(-1.5,0.5) D4(-0.5,0.5) D5(0.5,0.5) D6(1.5,0.5) D7(2.5,0.5) D8(3.5,0.5) E1(-3.5,-0.5) E2(-2.5,-0.5) E3(-1.5,-0.5) E4(-0.5,-0.5) E5(0.5,-0.5) E6(1.5,-0.5) E7(2.5,-0.5) E8(3.5,-0.5) F1(-3.5,-1.5) F2(-2.5,-1.5) F3(-1.5,-1.5) F4(-0.5,-1.5) F5(0.5,-1.5) F6(1.5,-1.5) F7(2.5,-1.5) F8(3.5,-1.5) G1(-3.5,-2.5) G2(-2.5,-2.5) G3(-1.5,-2.5) G4(-0.5,-2.5) G5(0.5,-2.5) G6(1.5,-2.5) G7(2.5,-2.5) G8(3.5,-2.5) H1(-3.5,-3.5) H2(-2.5,-3.5) H3(-1.5,-3.5) H4(-0.5,-3.5) H5(0.5,-3.5) H6(1.5,-3.5) H7(2.5,-3.5) H8(3.5,-3.5)
BL02RN2R1M2B
  round 1.524 hole 1.016: 1(-2.54,0) 2(2.54,0)
C0402
  rect 0.635x0.508 smd: 1(-0.508,0) 2(0.508,0)
C0603
  rect 0.813x0.889 smd: 1(-0.762,0) 2(0.762,0)
CONN_USB_B_CHL
  round 0.94 hole 0.94 unplated: (-2.2,1.445) (2.2,1.445)
  rect 0.508x2.032 smd: 1(-1.6,4.045) 2(-0.8,4.045) 3(0,4.045) 4(0.8,4.045) 5(1.6,4.045)
  rect 2.489x2.184 smd: 6(4.2,3.795) 7(4.2,-1.505) 8(-4.2,-1.505) 9(-4.2,3.795)
CP_64_15
  rect 0.755x0.3 smd: 1(-4.427,3.75) 2(-4.427,3.25) 3(-4.427,2.75) 4(-4.427,2.25) 5(-4.427,1.75) 6(-4.427,1.25) 7(-4.427,0.75) 8(-4.427,0.25) 9(-4.427,-0.25) 10(-4.427,-0.75) 11(-4.427,-1.25) 12(-4.427,-1.75) 13(-4.427,-2.25) 14(-4.427,-2.75) 15(-4.427,-3.25) 16(-4.427,-3.75) 33(4.427,-3.75) 34(4.427,-3.25) 35(4.427,-2.75) 36(4.427,-2.25) 37(4.427,-1.75) 38(4.427,-1.25) 39(4.427,-0.75) 40(4.427,-0.25) 41(4.427,0.25) 42(4.427,0.75) 43(4.427,1.25) 44(4.427,1.75) 45(4.427,2.25) 46(4.427,2.75) 47(4.427,3.25) 48(4.427,3.75)
  rect 0.3x0.755 smd: 17(-3.75,-4.427) 18(-3.25,-4.427) 19(-2.75,-4.427) 20(-2.25,-4.427) 21(-1.75,-4.427) 22(-1.25,-4.427) 23(-0.75,-4.427) 24(-0.25,-4.427) 25(0.25,-4.427) 26(0.75,-4.427) 27(1.25,-4.427) 28(1.75,-4.427) 29(2.25,-4.427) 30(2.75,-4.427) 31(3.25,-4.427) 32(3.75,-4.427) 49(3.75,4.427) 50(3.25,4.427) 51(2.75,4.427) 52(2.25,4.427) 53(1.75,4.427) 54(1.25,4.427) 55(0.75,4.427) 56(0.25,4.427) 57(-0.25,4.427) 58(-0.75,4.427) 59(-1.25,4.427) 60(-1.75,4.427) 61(-2.25,4.427) 62(-2.75,4.427) 63(-3.25,4.427) 64(-3.75,4.427)
  rect 7.6x7.6 smd: 65(0,0)
CT1206
  rect 1.651x1.88 smd: 1(-1.632,0) 2(1.632,0)
CT3528
  rect 2.032x2.286 smd: 1(-1.651,0) 2(1.651,0)
CT7343
  rect 3.302x2.413 smd: 1(-3.175,0) 2(3.175,0)
DFN8
  rect 0.254x0.914 smd: 1(-0.762,-1.499) 2(-0.254,-1.499) 3(0.254,-1.499) 4(0.762,-1.499) 5(0.762,1.499) 6(0.254,1.499) 7(-0.254,1.499) 8(-0.762,1.499)
  rect 2.54x1.626 smd: 9(0,0)
DIP8_3
  rect 1.524x1.524 hole 0.914: 1(0,0)
  round 1.524 hole 0.914: 2(0,-2.54) 3(0,-5.08) 4(0,-7.62) 5(7.62,-7.62) 6(7.62,-5.08) 7(7.62,-2.54) 8(7.62,0)
IHLP-2525
  rect 2.286x3.454 smd: 1(-2.794,0) 2(2.794,0)
JTAG-14P
  rect 1.397x1.397 hole 1.016: 1(5.131,3.226)
  round 1.397 hole 1.016: 2(5.131,5.766) 3(7.671,3.226) 4(7.671,5.766) 5(10.211,3.226) 6(10.211,5.766) 7(12.751,3.226) 8(12.751,5.766) 9(15.291,3.226) 10(15.291,5.766) 11(17.831,3.226) 12(17.831,5.766) 13(20.371,3.226) 14(20.371,5.766)
LED0603
  rect 1x1 smd: 1(-0.762,0) 2(0.762,0)
LFCSP16-HS
  rect 0.8x0.35 smd: 1(0.45,3.175) 2(0.45,2.525) 3(0.45,1.875) 4(0.45,1.225) 9(4.05,1.225) 10(4.05,1.875) 11(4.05,2.525) 12(4.05,3.175)
  rect 0.35x0.8 smd: 5(1.275,0.4) 6(1.925,0.4) 7(2.575,0.4) 8(3.225,0.4) 13(3.225,4) 14(2.575,4) 15(1.925,4) 16(1.275,4)
  rect 1.95x1.95 smd: PAD(2.25,2.2)
OSCSC508P-700X500-4M
  rect 2.032x1.778 smd: 1(-2.159,2.54) 2(-2.159,-2.54) 3(2.159,-2.54) 4(2.159,2.54)
OSCSC508P-750X508-4D
  rect 1.829x1.27 smd: 1(-1.956,2.54) 2(-1.956,-2.54) 3(1.956,-2.54) 4(1.956,2.54)
PSW2-T
  round 2.54 hole 1.524: 1(-2.54,0) 2(2.54,0)
PWR396P-4D
  round 2.54 hole 1.524: 1(-5.944,0) 2(-1.981,0) 3(1.981,0) 4(5.944,0)
QFN50P-500X500-32TD
  rect 0.61x0.254 smd: 1(-2.388,1.75) 2(-2.388,1.25) 3(-2.388,0.75) 4(-2.388,0.25) 5(-2.388,-0.25) 6(-2.388,-0.75) 7(-2.388,-1.25) 8(-2.388,-1.75) 17(2.388,-1.75) 18(2.388,-1.25) 19(2.388,-0.75) 20(2.388,-0.25) 21(2.388,0.25) 22(2.388,0.75) 23(2.388,1.25) 24(2.388,1.75)
  rect 0.254x0.61 smd: 9(-1.75,-2.388) 10(-1.25,-2.388) 11(-0.75,-2.388) 12(-0.25,-2.388) 13(0.25,-2.388) 14(0.75,-2.388) 15(1.25,-2.388) 16(1.75,-2.388) 25(1.75,2.388) 26(1.25,2.388) 27(0.75,2.388) 28(0.25,2.388) 29(-0.25,2.388) 30(-0.75,2.388) 31(-1.25,2.388) 32(-1.75,2.388)
  rect 3.099x3.099 smd: 33(0,0)
R0603
  rect 0.813x0.889 smd: 1(-0.762,0) 2(0.762,0)
R-PDSS-T10_CZ
  rrect 1.905x1.905 hole 1.397: 1(-7.935,6.35)
  round 2.032 hole 1.397: 2(-7.935,1.27) 3(-7.935,-6.35) 4(4.765,-6.35) 5(7.935,-6.35) 6(7.935,-3.81) 7(7.935,-1.27) 8(7.935,1.27) 9(7.935,3.81) 10(7.935,6.35)
SC0402
  rect 0.635x0.508 smd: 1(-0.508,0) 2(0.508,0)
SC0603
  rect 0.813x0.889 smd: 1(-0.762,0) 2(0.762,0)
SC1206
  rect 1.143x1.778 smd: 1(-1.524,0) 2(1.524,0)
SD0805-LED
  rect 1.016x1.27 smd: 1(-1.016,0) 2(1.016,0)
SIP-1P
  round 1.397 hole 0.914: 1(0,0)
SIP-2P
  rect 1.524x1.524 hole 1.016: 1(-1.27,0)
  round 1.524 hole 1.016: 2(1.27,0)
SL0603
  rect 0.762x0.813 smd: 1(-0.762,0) 2(0.762,0)
SMA
  round 2.54 hole 1.524: 1(0,0) 2(2.54,-2.54) 3(2.54,2.54) 4(-2.54,2.54) 5(-2.54,-2.54)
SMA5-RF
  round 2.54 hole 1.524: 1(0,0) 2(2.54,-2.54) 3(2.54,2.54) 4(-2.54,2.54) 5(-2.54,-2.54)
SMA_DONG1
  rect 1.016x1.016 smd: 1(0,0)
  round 2.54 hole 1.524: 2(2.54,-2.54) 3(2.54,2.54) 4(-2.54,2.54) 5(-2.54,-2.54)
SO16_50P300X413
  rect 2.032x0.635 smd: 1(-4.686,4.445) 2(-4.686,3.175) 3(-4.686,1.905) 4(-4.686,0.635) 5(-4.686,-0.635) 6(-4.686,-1.905) 7(-4.686,-3.175) 8(-4.686,-4.445) 9(4.686,-4.445) 10(4.686,-3.175) 11(4.686,-1.905) 12(4.686,-0.635) 13(4.686,0.635) 14(4.686,1.905) 15(4.686,3.175) 16(4.686,4.445)
SOP50P-300-16TN
  rect 1.524x0.305 smd: 1(-2.21,1.75) 2(-2.21,1.25) 3(-2.21,0.75) 4(-2.21,0.25) 5(-2.21,-0.25) 6(-2.21,-0.75) 7(-2.21,-1.25) 8(-2.21,-1.75) 9(2.21,-1.75) 10(2.21,-1.25) 11(2.21,-0.75) 12(2.21,-0.25) 13(2.21,0.25) 14(2.21,0.75) 15(2.21,1.25) 16(2.21,1.75)
  rect 1.626x2.845 smd: 17(0,0)
SOP63P-750-56N
  rect 1.981x0.305 smd: 1(-4.699,8.56) 2(-4.699,7.925) 3(-4.699,7.29) 4(-4.699,6.655) 5(-4.699,6.02) 6(-4.699,5.385) 7(-4.699,4.75) 8(-4.699,4.115) 9(-4.699,3.48) 10(-4.699,2.845) 11(-4.699,2.21) 12(-4.699,1.575) 13(-4.699,0.94) 14(-4.699,0.305) 15(-4.699,-0.33) 16(-4.699,-0.965) 17(-4.699,-1.6) 18(-4.699,-2.235) 19(-4.699,-2.87) 20(-4.699,-3.505) 21(-4.699,-4.14) 22(-4.699,-4.775) 23(-4.699,-5.41) 24(-4.699,-6.045) 25(-4.699,-6.68) 26(-4.699,-7.315) 27(-4.699,-7.95) 28(-4.699,-8.585) 29(4.699,-8.585) 30(4.699,-7.95) 31(4.699,-7.315) 32(4.699,-6.68) 33(4.699,-6.045) 34(4.699,-5.41) 35(4.699,-4.775) 36(4.699,-4.14) 37(4.699,-3.505) 38(4.699,-2.87) 39(4.699,-2.235) 40(4.699,-1.6) 41(4.699,-0.965) 42(4.699,-0.33) 43(4.699,0.305) 44(4.699,0.94) 45(4.699,1.575) 46(4.699,2.21) 47(4.699,2.845) 48(4.699,3.48) 49(4.699,4.115) 50(4.699,4.75) 51(4.699,5.385) 52(4.699,6.02) 53(4.699,6.655) 54(4.699,7.29) 55(4.699,7.925) 56(4.699,8.56)
SOP65P-440-16TN
  rect 1.575x0.305 smd: 1(-2.921,2.275) 2(-2.921,1.625) 3(-2.921,0.975) 4(-2.921,0.325) 5(-2.921,-0.325) 6(-2.921,-0.975) 7(-2.921,-1.625) 8(-2.921,-2.275) 9(2.921,-2.275) 10(2.921,-1.625) 11(2.921,-0.975) 12(2.921,-0.325) 13(2.921,0.325) 14(2.921,0.975) 15(2.921,1.625) 16(2.921,2.275)
  rect 2.438x3.404 smd: 17(0,0)
SOT23_6
  rect 0.584x1.321 smd: 1(-0.95,-1.219) 2(0,-1.219) 3(0.95,-1.219) 4(0.95,1.219) 5(0,1.219) 6(-0.95,1.219)
SOT-23
  rect 1.016x1.219 smd: 1(-1.016,-1.118) 2(1.016,-1.118) 3(0,1.118)
SR0402
  rect 0.635x0.508 smd: 1(-0.508,0) 2(0.508,0)
SR0603
  rect 0.813x0.889 smd: 1(-0.762,0) 2(0.762,0)
STC3216
  rect 1.778x1.397 smd: 1(-1.397,0) 2(1.397,0)
STC7343
  rect 3.302x2.413 smd: 1(-3.175,0) 2(3.175,0)
SW_SDA_10P
  rect 2.159x1.499 smd: 1(-4.115,5.08) 2(-4.115,2.54) 3(-4.115,0) 4(-4.115,-2.54) 5(-4.115,-5.08) 6(4.115,-5.08) 7(4.115,-2.54) 8(4.115,0) 9(4.115,2.54) 10(4.115,5.08)
TO170P-1394X457-5TN
  rect 2.794x1.067 smd: 1(-4.318,3.404) 2(-4.318,1.702) 3(-4.318,0) 4(-4.318,-1.702) 5(-4.318,-3.404)
  rect 8.89x10.668 smd: 6(5.08,0)
TP-40-SMD
  round 1.016 smd: 1(0,0)
TSOT-23-6
  rect 0.622x1.22 smd: 1(0.638,0.61) 2(1.587,0.61) 3(2.537,0.61) 4(2.537,3.23) 5(1.587,3.23) 6(0.638,3.23)
TSOT_5
  rect 0.66x1.27 smd: 1(-0.94,-1.146) 2(0,-1.146) 3(0.94,-1.146) 4(0.94,1.146) 5(-0.94,1.146)
unnamed
  round 5.08 hole 3.81: (0,0)
VQFN20
  rect 0.56x0.25 smd: 1(0.28,2.7) 5(0.28,0.9) 11(3.32,0.9) 15(3.32,2.7)
  rect 0.7x0.25 smd: 2(0.35,2.25) 3(0.35,1.8) 4(0.35,1.35) 12(3.25,1.35) 13(3.25,1.8) 14(3.25,2.25)
  rect 0.25x0.56 smd: 6(0.9,0.28) 10(2.7,0.28) 16(2.7,3.32) 20(0.9,3.32)
  rect 0.25x0.7 smd: 7(1.35,0.35) 8(1.8,0.35) 9(2.25,0.35) 17(2.25,3.25) 18(1.8,3.25) 19(1.35,3.25)
  rect 1.55x1.55 smd: 21(1.8,1.8)
XC7K410TFFG676
  round 0.508 smd: A1(-12.5,12.5) A2(-11.5,12.5) A3(-10.5,12.5) A4(-9.5,12.5) A5(-8.5,12.5) A6(-7.5,12.5) A7(-6.5,12.5) A8(-5.5,12.5) A9(-4.5,12.5) A10(-3.5,12.5) A11(-2.5,12.5) A12(-1.5,12.5) A13(-0.5,12.5) A14(0.5,12.5) A15(1.5,12.5) A16(2.5,12.5) A17(3.5,12.5) A18(4.5,12.5) A19(5.5,12.5) A20(6.5,12.5) A21(7.5,12.5) A22(8.5,12.5) A23(9.5,12.5) A24(10.5,12.5) A25(11.5,12.5) A26(12.5,12.5) AA1(-12.5,-7.5) AA2(-11.5,-7.5) AA3(-10.5,-7.5) AA4(-9.5,-7.5) AA5(-8.5,-7.5) AA6(-7.5,-7.5) AA7(-6.5,-7.5) AA8(-5.5,-7.5) AA9(-4.5,-7.5) AA10(-3.5,-7.5) AA11(-2.5,-7.5) AA12(-1.5,-7.5) AA13(-0.5,-7.5) AA14(0.5,-7.5) AA15(1.5,-7.5) AA16(2.5,-7.5) AA17(3.5,-7.5) AA18(4.5,-7.5) AA19(5.5,-7.5) AA20(6.5,-7.5) AA21(7.5,-7.5) AA22(8.5,-7.5) AA23(9.5,-7.5) AA24(10.5,-7.5) AA25(11.5,-7.5) AA26(12.5,-7.5) AB1(-12.5,-8.5) AB2(-11.5,-8.5) AB3(-10.5,-8.5) AB4(-9.5,-8.5) AB5(-8.5,-8.5) AB6(-7.5,-8.5) AB7(-6.5,-8.5) AB8(-5.5,-8.5) AB9(-4.5,-8.5) AB10(-3.5,-8.5) AB11(-2.5,-8.5) AB12(-1.5,-8.5) AB13(-0.5,-8.5) AB14(0.5,-8.5) AB15(1.5,-8.5) AB16(2.5,-8.5) AB17(3.5,-8.5) AB18(4.5,-8.5) AB19(5.5,-8.5) AB20(6.5,-8.5) AB21(7.5,-8.5) AB22(8.5,-8.5) AB23(9.5,-8.5) AB24(10.5,-8.5) AB25(11.5,-8.5) AB26(12.5,-8.5) AC1(-12.5,-9.5) AC2(-11.5,-9.5) AC3(-10.5,-9.5) AC4(-9.5,-9.5) AC5(-8.5,-9.5) AC6(-7.5,-9.5) AC7(-6.5,-9.5) AC8(-5.5,-9.5) AC9(-4.5,-9.5) AC10(-3.5,-9.5) AC11(-2.5,-9.5) AC12(-1.5,-9.5) AC13(-0.5,-9.5) AC14(0.5,-9.5) AC15(1.5,-9.5) AC16(2.5,-9.5) AC17(3.5,-9.5) AC18(4.5,-9.5) AC19(5.5,-9.5) AC20(6.5,-9.5) AC21(7.5,-9.5) AC22(8.5,-9.5) AC23(9.5,-9.5) AC24(10.5,-9.5) AC25(11.5,-9.5) AC26(12.5,-9.5) AD1(-12.5,-10.5) AD2(-11.5,-10.5) AD3(-10.5,-10.5) AD4(-9.5,-10.5) AD5(-8.5,-10.5) AD6(-7.5,-10.5) AD7(-6.5,-10.5) AD8(-5.5,-10.5) AD9(-4.5,-10.5) AD10(-3.5,-10.5) AD11(-2.5,-10.5) AD12(-1.5,-10.5) AD13(-0.5,-10.5) AD14(0.5,-10.5) AD15(1.5,-10.5) AD16(2.5,-10.5) AD17(3.5,-10.5) AD18(4.5,-10.5) AD19(5.5,-10.5) AD20(6.5,-10.5) AD21(7.5,-10.5) AD22(8.5,-10.5) AD23(9.5,-10.5) AD24(10.5,-10.5) AD25(11.5,-10.5) AD26(12.5,-10.5) AE1(-12.5,-11.5) AE2(-11.5,-11.5) AE3(-10.5,-11.5) AE4(-9.5,-11.5) AE5(-8.5,-11.5) AE6(-7.5,-11.5) AE7(-6.5,-11.5) AE8(-5.5,-11.5) AE9(-4.5,-11.5) AE10(-3.5,-11.5) AE11(-2.5,-11.5) AE12(-1.5,-11.5) AE13(-0.5,-11.5) AE14(0.5,-11.5) AE15(1.5,-11.5) AE16(2.5,-11.5) AE17(3.5,-11.5) AE18(4.5,-11.5) AE19(5.5,-11.5) AE20(6.5,-11.5) AE21(7.5,-11.5) AE22(8.5,-11.5) AE23(9.5,-11.5) AE24(10.5,-11.5) AE25(11.5,-11.5) AE26(12.5,-11.5) AF1(-12.5,-12.5) AF2(-11.5,-12.5) AF3(-10.5,-12.5) AF4(-9.5,-12.5) AF5(-8.5,-12.5) AF6(-7.5,-12.5) AF7(-6.5,-12.5) AF8(-5.5,-12.5) AF9(-4.5,-12.5) AF10(-3.5,-12.5) AF11(-2.5,-12.5) AF12(-1.5,-12.5) AF13(-0.5,-12.5) AF14(0.5,-12.5) AF15(1.5,-12.5) AF16(2.5,-12.5) AF17(3.5,-12.5) AF18(4.5,-12.5) AF19(5.5,-12.5) AF20(6.5,-12.5) AF21(7.5,-12.5) AF22(8.5,-12.5) AF23(9.5,-12.5) AF24(10.5,-12.5) AF25(11.5,-12.5) AF26(12.5,-12.5) B1(-12.5,11.5) B2(-11.5,11.5) B3(-10.5,11.5) B4(-9.5,11.5) B5(-8.5,11.5) B6(-7.5,11.5) B7(-6.5,11.5) B8(-5.5,11.5) B9(-4.5,11.5) B10(-3.5,11.5) B11(-2.5,11.5) B12(-1.5,11.5) B13(-0.5,11.5) B14(0.5,11.5) B15(1.5,11.5) B16(2.5,11.5) B17(3.5,11.5) B18(4.5,11.5) B19(5.5,11.5) B20(6.5,11.5) B21(7.5,11.5) B22(8.5,11.5) B23(9.5,11.5) B24(10.5,11.5) B25(11.5,11.5) B26(12.5,11.5) C1(-12.5,10.5) C2(-11.5,10.5) C3(-10.5,10.5) C4(-9.5,10.5) C5(-8.5,10.5) C6(-7.5,10.5) C7(-6.5,10.5) C8(-5.5,10.5) C9(-4.5,10.5) C10(-3.5,10.5) C11(-2.5,10.5) C12(-1.5,10.5) C13(-0.5,10.5) C14(0.5,10.5) C15(1.5,10.5) C16(2.5,10.5) C17(3.5,10.5) C18(4.5,10.5) C19(5.5,10.5) C20(6.5,10.5) C21(7.5,10.5) C22(8.5,10.5) C23(9.5,10.5) C24(10.5,10.5) C25(11.5,10.5) C26(12.5,10.5) D1(-12.5,9.5) D2(-11.5,9.5) D3(-10.5,9.5) D4(-9.5,9.5) D5(-8.5,9.5) D6(-7.5,9.5) D7(-6.5,9.5) D8(-5.5,9.5) D9(-4.5,9.5) D10(-3.5,9.5) D11(-2.5,9.5) D12(-1.5,9.5) D13(-0.5,9.5) D14(0.5,9.5) D15(1.5,9.5) D16(2.5,9.5) D17(3.5,9.5) D18(4.5,9.5) D19(5.5,9.5) D20(6.5,9.5) D21(7.5,9.5) D22(8.5,9.5) D23(9.5,9.5) D24(10.5,9.5) D25(11.5,9.5) D26(12.5,9.5) E1(-12.5,8.5) E2(-11.5,8.5) E3(-10.5,8.5) E4(-9.5,8.5) E5(-8.5,8.5) E6(-7.5,8.5) E7(-6.5,8.5) E8(-5.5,8.5) E9(-4.5,8.5) E10(-3.5,8.5) E11(-2.5,8.5) E12(-1.5,8.5) E13(-0.5,8.5) E14(0.5,8.5) E15(1.5,8.5) E16(2.5,8.5) E17(3.5,8.5) E18(4.5,8.5) E19(5.5,8.5) E20(6.5,8.5) E21(7.5,8.5) E22(8.5,8.5) E23(9.5,8.5) E24(10.5,8.5) E25(11.5,8.5) E26(12.5,8.5) F1(-12.5,7.5) F2(-11.5,7.5) F3(-10.5,7.5) F4(-9.5,7.5) F5(-8.5,7.5) F6(-7.5,7.5) F7(-6.5,7.5) F8(-5.5,7.5) F9(-4.5,7.5) F10(-3.5,7.5) F11(-2.5,7.5) F12(-1.5,7.5) F13(-0.5,7.5) F14(0.5,7.5) F15(1.5,7.5) F16(2.5,7.5) F17(3.5,7.5) F18(4.5,7.5) F19(5.5,7.5) F20(6.5,7.5) F21(7.5,7.5) F22(8.5,7.5) F23(9.5,7.5) F24(10.5,7.5) F25(11.5,7.5) F26(12.5,7.5) G1(-12.5,6.5) G2(-11.5,6.5) G3(-10.5,6.5) G4(-9.5,6.5) G5(-8.5,6.5) G6(-7.5,6.5) G7(-6.5,6.5) G8(-5.5,6.5) G9(-4.5,6.5) G10(-3.5,6.5) G11(-2.5,6.5) G12(-1.5,6.5) G13(-0.5,6.5) G14(0.5,6.5) G15(1.5,6.5) G16(2.5,6.5) G17(3.5,6.5) G18(4.5,6.5) G19(5.5,6.5) G20(6.5,6.5) G21(7.5,6.5) G22(8.5,6.5) G23(9.5,6.5) G24(10.5,6.5) G25(11.5,6.5) G26(12.5,6.5) H1(-12.5,5.5) H2(-11.5,5.5) H3(-10.5,5.5) H4(-9.5,5.5) H5(-8.5,5.5) H6(-7.5,5.5) H7(-6.5,5.5) H8(-5.5,5.5) H9(-4.5,5.5) H10(-3.5,5.5) H11(-2.5,5.5) H12(-1.5,5.5) H13(-0.5,5.5) H14(0.5,5.5) H15(1.5,5.5) H16(2.5,5.5) H17(3.5,5.5) H18(4.5,5.5) H19(5.5,5.5) H20(6.5,5.5) H21(7.5,5.5) H22(8.5,5.5) H23(9.5,5.5) H24(10.5,5.5) H25(11.5,5.5) H26(12.5,5.5) J1(-12.5,4.5) J2(-11.5,4.5) J3(-10.5,4.5) J4(-9.5,4.5) J5(-8.5,4.5) J6(-7.5,4.5) J7(-6.5,4.5) J8(-5.5,4.5) J9(-4.5,4.5) J10(-3.5,4.5) J11(-2.5,4.5) J12(-1.5,4.5) J13(-0.5,4.5) J14(0.5,4.5) J15(1.5,4.5) J16(2.5,4.5) J17(3.5,4.5) J18(4.5,4.5) J19(5.5,4.5) J20(6.5,4.5) J21(7.5,4.5) J22(8.5,4.5) J23(9.5,4.5) J24(10.5,4.5) J25(11.5,4.5) J26(12.5,4.5) K1(-12.5,3.5) K2(-11.5,3.5) K3(-10.5,3.5) K4(-9.5,3.5) K5(-8.5,3.5) K6(-7.5,3.5) K7(-6.5,3.5) K8(-5.5,3.5) K9(-4.5,3.5) K10(-3.5,3.5) K11(-2.5,3.5) K12(-1.5,3.5) K13(-0.5,3.5) K14(0.5,3.5) K15(1.5,3.5) K16(2.5,3.5) K17(3.5,3.5) K18(4.5,3.5) K19(5.5,3.5) K20(6.5,3.5) K21(7.5,3.5) K22(8.5,3.5) K23(9.5,3.5) K24(10.5,3.5) K25(11.5,3.5) K26(12.5,3.5) L1(-12.5,2.5) L2(-11.5,2.5) L3(-10.5,2.5) L4(-9.5,2.5) L5(-8.5,2.5) L6(-7.5,2.5) L7(-6.5,2.5) L8(-5.5,2.5) L9(-4.5,2.5) L10(-3.5,2.5) L11(-2.5,2.5) L12(-1.5,2.5) L13(-0.5,2.5) L14(0.5,2.5) L15(1.5,2.5) L16(2.5,2.5) L17(3.5,2.5) L18(4.5,2.5) L19(5.5,2.5) L20(6.5,2.5) L21(7.5,2.5) L22(8.5,2.5) L23(9.5,2.5) L24(10.5,2.5) L25(11.5,2.5) L26(12.5,2.5) M1(-12.5,1.5) M2(-11.5,1.5) M3(-10.5,1.5) M4(-9.5,1.5) M5(-8.5,1.5) M6(-7.5,1.5) M7(-6.5,1.5) M8(-5.5,1.5) M9(-4.5,1.5) M10(-3.5,1.5) M11(-2.5,1.5) M12(-1.5,1.5) M13(-0.5,1.5) M14(0.5,1.5) M15(1.5,1.5) M16(2.5,1.5) M17(3.5,1.5) M18(4.5,1.5) M19(5.5,1.5) M20(6.5,1.5) M21(7.5,1.5) M22(8.5,1.5) M23(9.5,1.5) M24(10.5,1.5) M25(11.5,1.5) M26(12.5,1.5) N1(-12.5,0.5) N2(-11.5,0.5) N3(-10.5,0.5) N4(-9.5,0.5) N5(-8.5,0.5) N6(-7.5,0.5) N7(-6.5,0.5) N8(-5.5,0.5) N9(-4.5,0.5) N10(-3.5,0.5) N11(-2.5,0.5) N12(-1.5,0.5) N13(-0.5,0.5) N14(0.5,0.5) N15(1.5,0.5) N16(2.5,0.5) N17(3.5,0.5) N18(4.5,0.5) N19(5.5,0.5) N20(6.5,0.5) N21(7.5,0.5) N22(8.5,0.5) N23(9.5,0.5) N24(10.5,0.5) N25(11.5,0.5) N26(12.5,0.5) P1(-12.5,-0.5) P2(-11.5,-0.5) P3(-10.5,-0.5) P4(-9.5,-0.5) P5(-8.5,-0.5) P6(-7.5,-0.5) P7(-6.5,-0.5) P8(-5.5,-0.5) P9(-4.5,-0.5) P10(-3.5,-0.5) P11(-2.5,-0.5) P12(-1.5,-0.5) P13(-0.5,-0.5) P14(0.5,-0.5) P15(1.5,-0.5) P16(2.5,-0.5) P17(3.5,-0.5) P18(4.5,-0.5) P19(5.5,-0.5) P20(6.5,-0.5) P21(7.5,-0.5) P22(8.5,-0.5) P23(9.5,-0.5) P24(10.5,-0.5) P25(11.5,-0.5) P26(12.5,-0.5) R1(-12.5,-1.5) R2(-11.5,-1.5) R3(-10.5,-1.5) R4(-9.5,-1.5) R5(-8.5,-1.5) R6(-7.5,-1.5) R7(-6.5,-1.5) R8(-5.5,-1.5) R9(-4.5,-1.5) R10(-3.5,-1.5) R11(-2.5,-1.5) R12(-1.5,-1.5) R13(-0.5,-1.5) R14(0.5,-1.5) R15(1.5,-1.5) R16(2.5,-1.5) R17(3.5,-1.5) R18(4.5,-1.5) R19(5.5,-1.5) R20(6.5,-1.5) R21(7.5,-1.5) R22(8.5,-1.5) R23(9.5,-1.5) R24(10.5,-1.5) R25(11.5,-1.5) R26(12.5,-1.5) T1(-12.5,-2.5) T2(-11.5,-2.5) T3(-10.5,-2.5) T4(-9.5,-2.5) T5(-8.5,-2.5) T6(-7.5,-2.5) T7(-6.5,-2.5) T8(-5.5,-2.5) T9(-4.5,-2.5) T10(-3.5,-2.5) T11(-2.5,-2.5) T12(-1.5,-2.5) T13(-0.5,-2.5) T14(0.5,-2.5) T15(1.5,-2.5) T16(2.5,-2.5) T17(3.5,-2.5) T18(4.5,-2.5) T19(5.5,-2.5) T20(6.5,-2.5) T21(7.5,-2.5) T22(8.5,-2.5) T23(9.5,-2.5) T24(10.5,-2.5) T25(11.5,-2.5) T26(12.5,-2.5) U1(-12.5,-3.5) U2(-11.5,-3.5) U3(-10.5,-3.5) U4(-9.5,-3.5) U5(-8.5,-3.5) U6(-7.5,-3.5) U7(-6.5,-3.5) U8(-5.5,-3.5) U9(-4.5,-3.5) U10(-3.5,-3.5) U11(-2.5,-3.5) U12(-1.5,-3.5) U13(-0.5,-3.5) U14(0.5,-3.5) U15(1.5,-3.5) U16(2.5,-3.5) U17(3.5,-3.5) U18(4.5,-3.5) U19(5.5,-3.5) U20(6.5,-3.5) U21(7.5,-3.5) U22(8.5,-3.5) U23(9.5,-3.5) U24(10.5,-3.5) U25(11.5,-3.5) U26(12.5,-3.5) V1(-12.5,-4.5) V2(-11.5,-4.5) V3(-10.5,-4.5) V4(-9.5,-4.5) V5(-8.5,-4.5) V6(-7.5,-4.5) V7(-6.5,-4.5) V8(-5.5,-4.5) V9(-4.5,-4.5) V10(-3.5,-4.5) V11(-2.5,-4.5) V12(-1.5,-4.5) V13(-0.5,-4.5) V14(0.5,-4.5) V15(1.5,-4.5) V16(2.5,-4.5) V17(3.5,-4.5) V18(4.5,-4.5) V19(5.5,-4.5) V20(6.5,-4.5) V21(7.5,-4.5) V22(8.5,-4.5) V23(9.5,-4.5) V24(10.5,-4.5) V25(11.5,-4.5) V26(12.5,-4.5) W1(-12.5,-5.5) W2(-11.5,-5.5) W3(-10.5,-5.5) W4(-9.5,-5.5) W5(-8.5,-5.5) W6(-7.5,-5.5) W7(-6.5,-5.5) W8(-5.5,-5.5) W9(-4.5,-5.5) W10(-3.5,-5.5) W11(-2.5,-5.5) W12(-1.5,-5.5) W13(-0.5,-5.5) W14(0.5,-5.5) W15(1.5,-5.5) W16(2.5,-5.5) W17(3.5,-5.5) W18(4.5,-5.5) W19(5.5,-5.5) W20(6.5,-5.5) W21(7.5,-5.5) W22(8.5,-5.5) W23(9.5,-5.5) W24(10.5,-5.5) W25(11.5,-5.5) W26(12.5,-5.5) Y1(-12.5,-6.5) Y2(-11.5,-6.5) Y3(-10.5,-6.5) Y4(-9.5,-6.5) Y5(-8.5,-6.5) Y6(-7.5,-6.5) Y7(-6.5,-6.5) Y8(-5.5,-6.5) Y9(-4.5,-6.5) Y10(-3.5,-6.5) Y11(-2.5,-6.5) Y12(-1.5,-6.5) Y13(-0.5,-6.5) Y14(0.5,-6.5) Y15(1.5,-6.5) Y16(2.5,-6.5) Y17(3.5,-6.5) Y18(4.5,-6.5) Y19(5.5,-6.5) Y20(6.5,-6.5) Y21(7.5,-6.5) Y22(8.5,-6.5) Y23(9.5,-6.5) Y24(10.5,-6.5) Y25(11.5,-6.5) Y26(12.5,-6.5)
XTAL2-200
  round 1.397 hole 0.889: 1(-2.54,0) 2(2.54,0)

## Nets
1V0: C28.1 C41.1 L14.1 R100.2 U6.4(VO) U6.5(+SENSE)
1V2IO: C121.1 C124.1 C133.1 C149.1 C151.1 C156.1 C170.1 C177.1 C265.1 C273.1 L18.1 R107.1 U8.B3(MGTAVTT#B3) U8.C2(MGTAVTT#C2) U8.D3(MGTAVTT#D3) U8.G2(MGTAVTT#G2) U8.H3(MGTAVTT#H3) U8.L2(MGTAVTT#L2) U8.M3(MGTAVTT#M3) U8.M5(MGTAVTTRCAL_115)
1V8IO: C18.1 C19.1 C25.1 C80.1 C144.1 C191.1 C199.1 C213.1 C214.1 C216.1 C218.1 C221.1 C222.1 C223.1 C224.1 C227.1 C229.1 C231.1 C232.1 C233.1 C234.1 C236.1 C238.1 C243.1 C245.1 C246.1 C247.1 C251.1 C252.1 C270.1 C278.1 C288.1 C289.1 J2.1 L22.1 R55.1 R60.1 R69.1 R72.1 U8.AA1(VCCO_34#AA1) U8.AA11(VCCO_33#AA11) U8.AB8(VCCO_33#AB8) U8.AB18(VCCO_32#AB18) U8.AC5(VCCO_34#AC5) U8.AC15(VCCO_32#AC15) U8.AD2(VCCO_34#AD2) U8.AD12(VCCO_33#AD12) U8.AE9(VCCO_33#AE9) U8.AE19(VCCO_32#AE19) U8.AF6(VCCO_34#AF6) U8.AF16(VCCO_32#AF16) U8.L11(VCCAUX#L11) U8.M10(VCCAUX#M10) U8.M12(VCCADC_0) U8.N6(MGTVCCAUX) U8.P8(VCCAUX_IO_G0#P8) U8.P10(VCCAUX#P10) U8.R9(VCCAUX_IO_G0#R9) U8.T8(VCCAUX_IO_G0#T8) U8.T10(VCCAUX#T10) U8.U3(VCCO_34#U3) U8.U11(VCCAUX#U11) U8.V10(VCCO_33#V10) U8.W7(VCCO_33#W7) U8.W17(VCCO_32#W17) U8.Y4(VCCO_34#Y4) U8.Y14(VCCO_32#Y14) U9.1(VIN1) U9.2(VIN2) U9.3(VIN3) U9.15(VIN4) U9.16(VIN5) U15.1(VIN1) U15.2(VIN2) U15.3(VIN3) U15.15(VIN4) U15.16(VIN5) U18.A6(VCC1) U18.H3(VCC2)
1V25ADC_A: C34.2 C39.1 C49.1 C51.1 C56.1 C67.1 C77.1 C130.1 C142.1 C175.1 C181.1 C185.1 C192.1 C206.1 C237.1 C240.1 C250.1 L15.2 U7.1(AVDD1_1) U7.2(AVDD1_2) U7.47(AVDD1_3) U7.48(AVDD1_4) U7.49(AVDD1_5) U7.52(AVDD1_6) U7.55(AVDD1_12) U7.57(AVDD1_SR) U7.61(AVDD1_7) U7.64(AVDD1_8)
1V25ADC_D: C31.1 C40.1 C68.1 C78.1 C157.1 C189.1 C204.1 C230.1 C271.1 C277.1 L20.2 U7.15(DVDD_1) U7.19(DRVDD_1) U7.30(DRVDD_2) U7.34(DVDD_2)
1VADC_A: C212.1 C244.1 C267.1 C274.1 L17.2 U7.12(V_1P0)
2V5_PRE: C11.2 C13.2 C97.2 C113.2 L3.1 L10.2 R81.2
2V5ADC_A: C35.1 C38.1 C62.1 C66.1 C72.1 C73.1 C98.1 C100.1 C141.1 C154.1 C161.1 C210.1 C211.1 C217.1 L6.2 U7.3(AVDD2_1) U7.8(AVDD2_2) U7.9(AVDD2_3) U7.10(AVDD2_4) U7.11(AVDD2_5) U7.39(AVDD2_6) U7.40(AVDD2_7) U7.41(AVDD2_8) U7.46(AVDD2_9) U7.50(AVDD2_10) U7.51(AVDD2_11) U7.62(AVDD2_13) U7.63(AVDD2_14)
2V5IO: C17.1 C20.1 C21.1 C22.1 C30.1 C89.1 C112.2 C115.1 C118.1 C120.1 C127.1 C128.1 C137.1 C138.1 C146.1 C147.1 C150.1 C155.1 C163.1 C168.1 C176.1 C178.1 C183.1 C190.1 C201.1 C205.1 C208.1 C209.1 C268.1 J5.2 J8.1 L10.1 R10.1 R14.1 R18.1 R19.1 R20.1 R21.1 R23.2 R24.2 R25.1 R27.1 R50.1 R63.1 R75.1 R82.1 R85.1 R86.1 R87.2 R119.1 SW1.6(B5) SW1.7(B4) SW1.8(B3) U8.A21(VCCO_14#A21) U8.B18(VCCO_15#B18) U8.C25(VCCO_14#C25) U8.D22(VCCO_14#D22) U8.E19(VCCO_15#E19) U8.F16(VCCO_15#F16) U8.F26(VCCO_14#F26) U8.G23(VCCO_14#G23) U8.H20(VCCO_15#H20) U8.J17(VCCO_15#J17) U8.K24(VCCO_13#K24) U8.L7(VCCO_0#L7) U8.L21(VCCO_14#L21) U8.M18(VCCO_15#M18) U8.N25(VCCO_13#N25) U8.P7(CFGBVS_0) U8.P22(VCCO_13#P22) U8.R19(VCCO_13#R19) U8.T6(VCCO_0#T6) U8.T16(VCCO_13#T16) U8.T26(VCCO_13#T26) U13.12(IN#12) U13.13(IN#13) U13.14(IN#14) U16.12(IN#12) U16.13(IN#13) U16.14(IN#14) U18.A4(VPP) U18.C6(WP_B) U18.D5(VCCQ1) U18.D6(VCCQ2) U18.G4(VCCQ3) U19.5(VCC)
3V3_PRE: C12.2 C14.2 C96.2 C110.2 L4.2 L11.1 R76.2
3V3ADC_A: C29.1 C37.1 C69.1 C70.1 C103.1 C105.1 C140.1 J1.1 L8.2 U7.4(AVDD3_1) U7.7(AVDD3_2#7) U7.42(AVDD3_2#42) U7.45(AVDD3_3)
3V3CY: C9.1 C81.1 C83.1 C86.2 C91.1 C111.2 C122.1 C125.1 C126.1 C129.1 C134.1 C139.1 C148.1 C169.1 C219.1 C225.1 C226.1 C228.1 C241.1 C242.1 C248.1 C254.1 C255.1 C259.2 C261.2 C263.2 C264.2 C280.2 C281.2 C287.1 L5.1 L11.2 L19.1 R115.1 R116.1 R117.1 R121.1 R123.1 R124.1 R339.1 U5.1(VIN) U5.3(EN) U8.A11(VCCO_16#A11) U8.AA21(VCCO_12#AA21) U8.AC25(VCCO_12#AC25) U8.AD22(VCCO_12#AD22) U8.AF26(VCCO_12#AF26) U8.B8(VCCO_16#B8) U8.C15(VCCO_16#C15) U8.D12(VCCO_16#D12) U8.E9(VCCO_16#E9) U8.G13(VCCO_16#G13) U8.H10(VCCO_16#H10) U8.U23(VCCO_12#U23) U8.V20(VCCO_12#V20) U8.Y24(VCCO_12#Y24) U10.3(VIN) U11.8(VCC) U14.6(VCC#6) U14.18(VCC#18) U14.24(VCC#24) U14.34(VCC#34) U14.39(VCC#39) U14.50(VCC#50) Y3.4(VCC) Y4.4(VCC)
3V3PLL: C36.2 C42.2 C43.2 C45.2 C46.1 C53.1 C55.2 C59.2 C63.2 C64.2 C74.1 C101.1 C106.1 C116.2 C145.2 C152.1 C166.1 L7.2 L23.2 R22.2 R26.2 R29.2 R36.1 R37.1 R106.2 U20.6(VCCCP) U20.10(VCCPLL) U20.17(VCCVCO) U20.28(VCCDIG) U20.32(VCCFRAC) Y2.4(VCC)
DVDD1V8: C15.1 C71.1 C107.1 C136.1 C235.1 J10.2 L9.2 U7.13(SPIVDD_1) U7.38(SPIVDD_2)
GND_FIELD SIGNAL: C276.2 R122.1 U12.6 U12.7 U12.8 U12.9
VIN: C1.2 C2.2 C3.2 C4.2 C92.1 C93.1 C94.1 C95.1 C99.1 C109.1 C114.1 C119.1 C123.1 C394.1 C395.1 L12.2 L13.2 R4.1 R5.2 R102.2 R129.2 R330.1 U1.1(/SHDN) U1.2(IN) U2.1(/SHDN) U2.2(IN) U4.1(VIN1) U4.16(VIN2) U6.2(VI) U27.14(VDD)
VIN+A: C75.1 U7.5(VIN-A)
VIN+B: C33.1 U7.43(VIN+B)
VIN-A: C76.1 U7.6(VIN+A)
VIN-B: C32.1 U7.44(VIN-B)
